# Altium PCB PCB1.PcbDoc
Units mm, origin at the board's own origin, x right, y up, seen from the top; angles counter-clockwise.
Board outline 152.4 x 101.6 mm, 6 copper layers (Top Layer, Int1 (GND), Int2 (Sign), Int3 (Sign), Int4 (PWR), Bottom Layer), stack 1.551 mm thick; 102 components, 80 nets, 404 pads, 0 vias.
Unrouted connection lines stored in the file: 218.
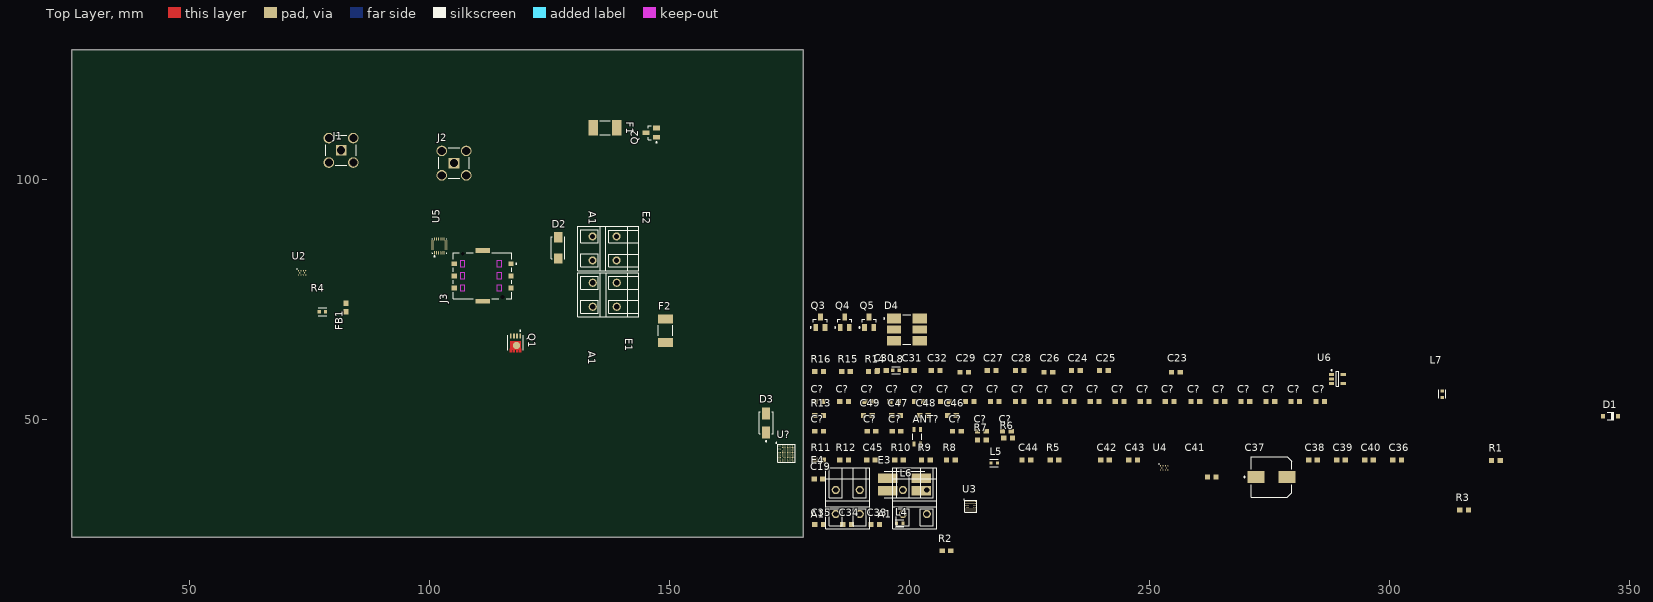
[diagram p0: Top Layer view]
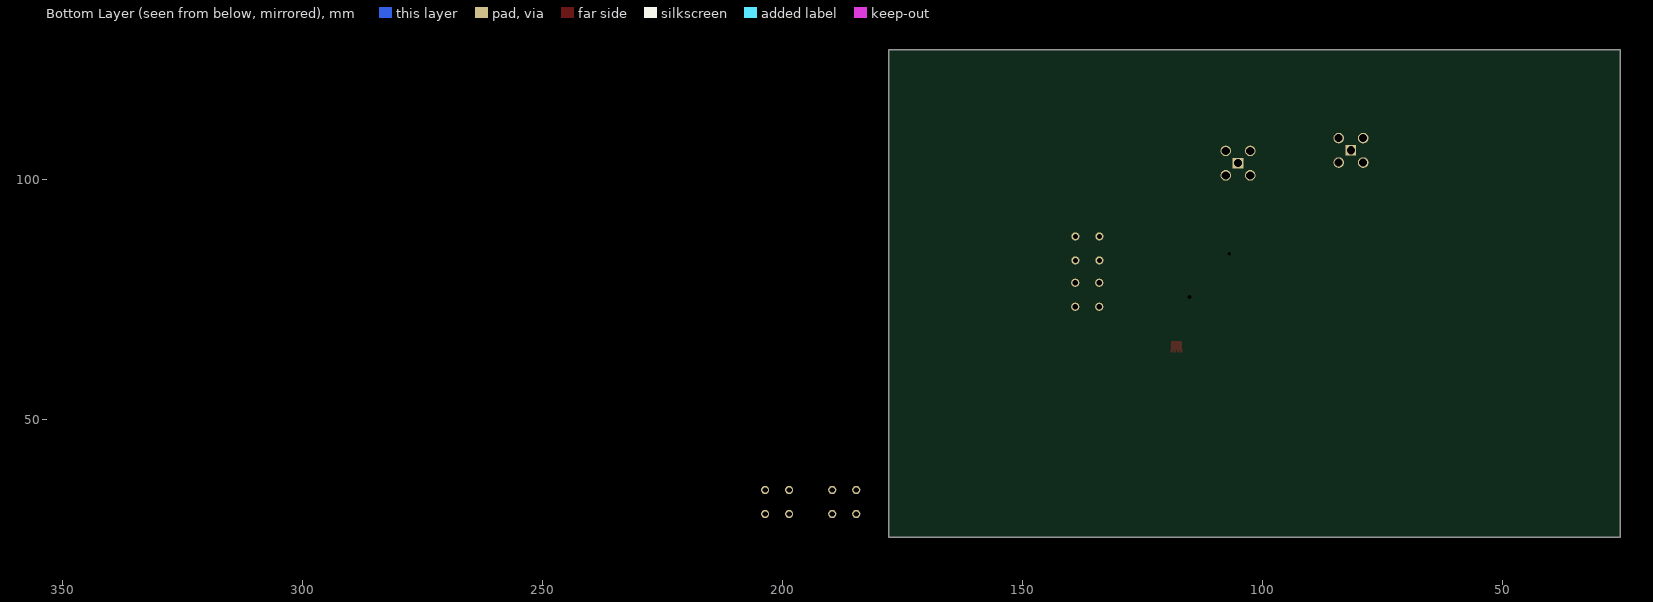
[diagram p1: Bottom Layer view, seen from below]
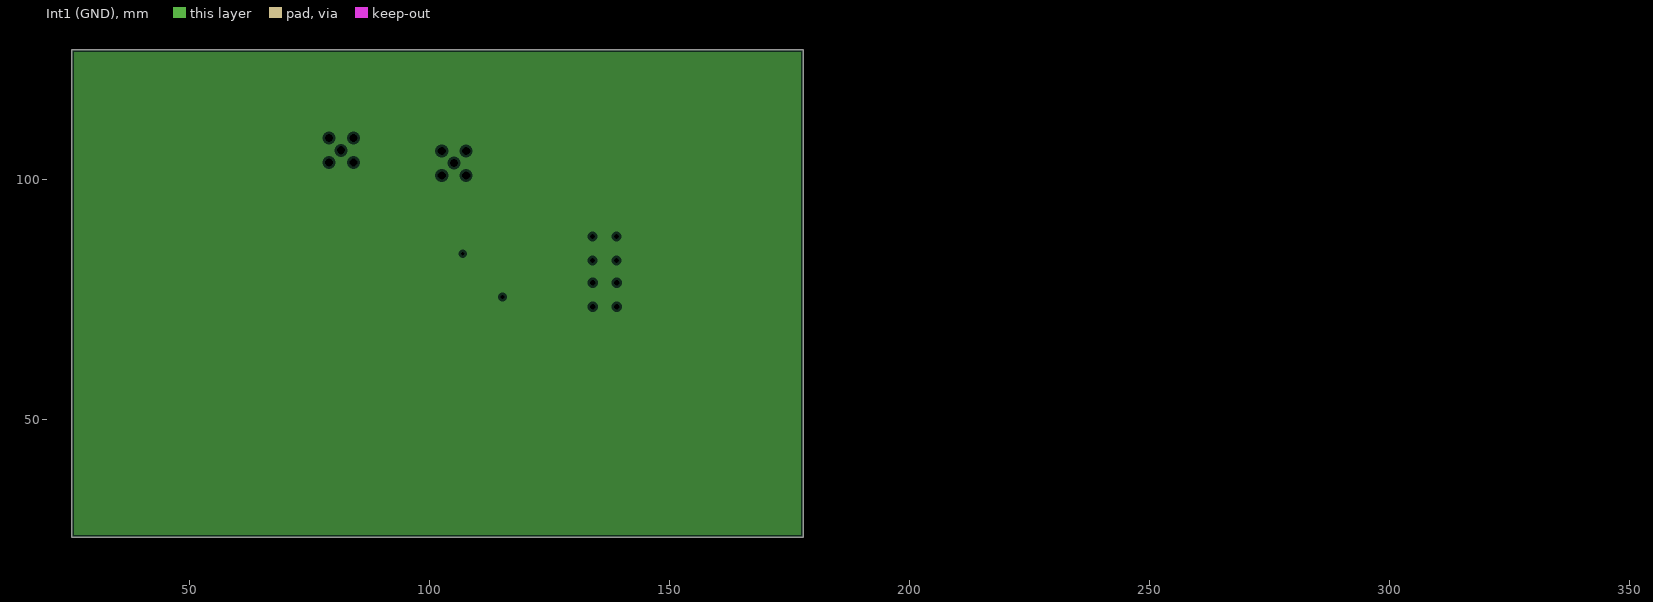
[diagram p2: Int1 (GND), clearances drawn from the general rule]
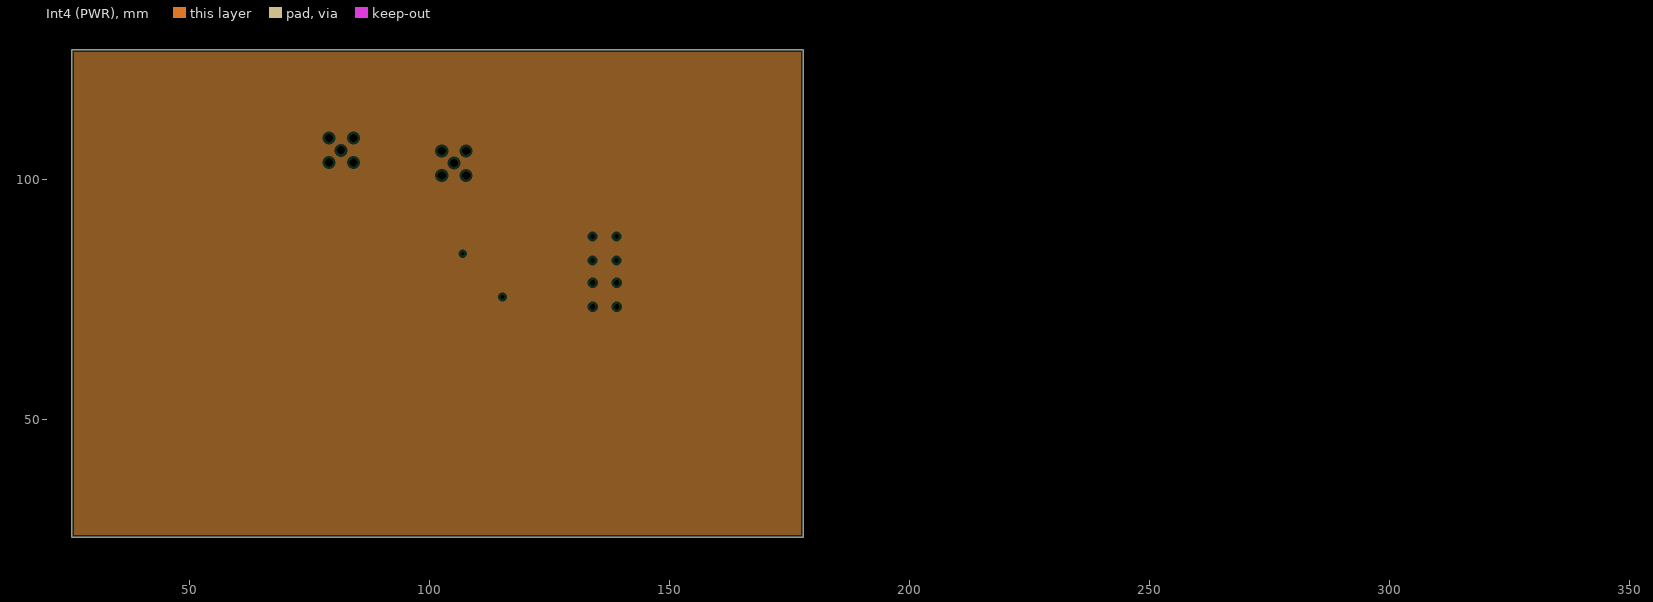
[diagram p3: Int4 (PWR), clearances drawn from the general rule]

## Layer stack, top to bottom
Top Solder: solder mask 0.0254, SM-001, Dk 4
Top Layer: signal copper 0.035
Dielectric 1: prepreg 0.0711, PP-006, Dk 4.1
Dielectric 2: prepreg 0.0711, PP-006, Dk 4.1
Int1 (GND): plane copper 0.035
Dielectric 3: core 0.4572, Core-035, Dk 4.7
Int2 (Sign): signal copper 0.035
Dielectric 4: prepreg 0.0711, PP-006, Dk 4.1
Dielectric 5: prepreg 0.0711, PP-006, Dk 4.1
Int3 (Sign): signal copper 0.035
Dielectric 6: core 0.4572, Core-035, Dk 4.7
Int4 (PWR): plane copper 0.035
Dielectric 7: prepreg 0.0711, PP-006, Dk 4.1
Dielectric 8: prepreg 0.0711, PP-006, Dk 4.1
Bottom Layer: signal copper 0.035
Bottom Solder: solder mask 0.0254, SM-001, Dk 4

## Board outline
25.4,25.4 177.8,25.4 177.8,127 25.4,127

## Design rules (kind name [scope] priority, off if disabled: settings)
Clearance [All] p1: gap=0.127 ignorepadtopadclearanceinfootprint=FALSE
HoleSize [All] p1: absolutevalues=TRUE maxlimit=2.54 minlimit=0.2 maxpercent=80.000 minpercent=20.000
PlaneClearance [All] p1: clearance=0.508
PlaneConnect [All] p1: planeconnectstyle=Relief reliefexpansion=0.508 reliefentries=4 reliefconductorwidth=0.254 reliefairgap=0.254
PolygonConnect [All] p1: connectstyle=Relief reliefconductorwidth=0.254 reliefentries=4 polygonreliefangle="90 Angle" airgapwidth=0.254
RoomDefinition "Sensors and peripherals" [InComponentClass('Sensors and peripherals')] p1: confinementstyle=ConfineIn formatcopy=TRUE lockcomponents=FALSE outline 178.943,65.024 203.962,65.024 203.962,74.93 178.943,74.93
RoomDefinition Power [InComponentClass('Power')] p2: confinementstyle=ConfineIn formatcopy=TRUE lockcomponents=FALSE outline 178.943,58.674 199.136,58.674 199.136,63.754 178.943,63.754
RoomDefinition nrf52840_qiaa_config5 [InComponentClass('nrf52840_qiaa_config5')] p3: confinementstyle=ConfineIn formatcopy=TRUE lockcomponents=FALSE outline 178.943,46.228 287.655,46.228 287.655,57.531 178.943,57.531
RoomDefinition NRF52840 [InComponentClass('NRF52840')] p4: confinementstyle=ConfineIn formatcopy=TRUE lockcomponents=FALSE outline 178.943,43.307 287.655,43.307 287.655,57.531 178.943,57.531
RoomDefinition NRF9160 [InComponentClass('NRF9160')] p5: confinementstyle=ConfineIn formatcopy=TRUE lockcomponents=FALSE outline 0,0 50.8,0 50.8,25.4 0,25.4
RoomDefinition Connector [InComponentClass('Connector')] p6: confinementstyle=ConfineIn formatcopy=TRUE lockcomponents=FALSE outline 178.943,26.924 205.994,26.924 205.994,42.672 178.943,42.672
RoutingVias [All] p1: holewidth=0.2 width=0.5 viastyle="Through Hole" minholewidth=0.2 minwidth=0.4 maxholewidth=0.711 maxwidth=1.27
SolderMaskExpansion [All] p1: expansion=0.102 istentingtop=FALSE
Width [All] p1: maxlimit=1.5 minlimit=0.127 preferedwidth=0.254 minimp=50.000000 maximp=50.000000 favimp=50.000000
27 further rules are at their usual default settings.

## Classes and differential pairs
component class NRF52840: A? ANT? C? U?
component class Connector: E1 E2 E3 E4
component class "Sensors and peripherals": C45 C46 C47 C48 C49 D3 D4 F2 J3 Q2 Q3 Q4 Q5 R13 U4 U5 U6
component class Power: C34 C35 C36 C37 C38 C39 C40 C41 C42 C43 C44 D1 D2 F1 L6 L7 L8 Q1 R3 R4 R5 R6 R7 R8 R9 R10 R11 R12 R14 R15 R16 U3
component class NRF9160: C19 C23 C24 C25 C26 C27 C28 C29 C30 C31 C32 C33 FB1 J1 J2 L4 R1 R2 U2
net class RF: GPS_RF1 GPS_RF2 LTE_RF1
net class "High Power": NetD3_1 NetD3_2
component class nrf52840_qiaa_config5: C? L5

## Components (designator, comment, footprint, x,y, rotation, side; value= is the part's Value field where it differs from the comment)
ANT? "2450AT18D0100E" FP-2450AT18D0100E-MFG 201.549,46.355 r90 top
C19 "15pF" "C0603 (1608)" 180.964,37.592 r0 top
C23 "100nF" "C0603 (1608)" 255.397,59.817 r0 top
C24 "100nF" "C0603 (1608)" 234.569,60.198 r0 top value=47uF
C25 "Cap SMD" "C0603 (1608)" 240.411,60.198 r0 top value=39pF
C26 "15pF" "C0603 (1608)" 228.854,59.817 r0 top value=47uF
C27 "100nF" "C0603 (1608)" 217.043,60.198 r0 top
C28 "Cap SMD" "C0603 (1608)" 222.885,60.198 r0 top value=4.7uF
C29 "100nF" "C0603 (1608)" 211.328,59.817 r0 top
C30 "100nF" "C0603 (1608)" 194.183,60.198 r0 top value=15pF
C31 "100nF" "C0603 (1608)" 200.025,60.198 r0 top
C32 "Cap SMD" "C0603 (1608)" 205.359,60.198 r0 top value=39pF
C33 "Cap SMD" "C0603 (1608)" 192.786,28.067 r0 top value=4.7uF
C34 "Cap SMD" "C0603 (1608)" 186.944,28.067 r0 top value=4.7uF
C35 "Cap SMD" "C0603 (1608)" 181.102,28.067 r0 top value=4.7uF
C36 "Cap SMD" "C0603 (1608)" 301.498,41.529 r0 top value=4.7uF
C37 "UUD1A471MNL1GS" FP-UUD1A471MNL1GS-MFG 275.336,37.973 r0 top
C38 "Cap SMD" "C0603 (1608)" 283.972,41.529 r0 top value=4.7uF
C39 "Cap SMD" "C0603 (1608)" 289.814,41.529 r0 top value=4.7uF
C40 "Cap SMD" "C0603 (1608)" 295.656,41.529 r0 top value=4.7uF
C41 "Cap SMD" "C0603 (1608)" 262.89,37.973 r0 top value=4.7uF
C42 "Cap SMD" "C0603 (1608)" 240.665,41.529 r0 top value=10uF
C43 "Cap SMD" "C0603 (1608)" 246.507,41.529 r0 top value=10uF
C44 "Cap SMD" "C0603 (1608)" 224.282,41.529 r0 top value=10uF
C45 "Cap SMD" "C0603 (1608)" 191.897,41.529 r0 top value=4.7uF
C46 "100nF" "C0603 (1608)" 208.788,50.8 r0 top
C47 "100nF" "C0603 (1608)" 197.104,50.8 r0 top
C48 "100nF" "C0603 (1608)" 202.946,50.8 r0 top
C49 "100nF" "C0603 (1608)" 191.262,50.8 r0 top
C? "100nF" "C0603 (1608)" 233.299,53.721 r0 top
C? "100nF" "C0603 (1608)" 201.93,53.721 r0 top
C? "100nF" "C0603 (1608)" 248.92,53.721 r0 top
C? "100nF" "C0603 (1608)" 186.309,53.721 r0 top
C? "100nF" "C0603 (1608)" 181.102,53.721 r0 top
C? "100nF" "C0603 (1608)" 254.127,53.721 r0 top
C? "100nF" "C0603 (1608)" 280.289,53.721 r0 top
C? "100nF" "C0603 (1608)" 181.102,47.498 r0 top
C? "100nF" "C0603 (1608)" 215.011,47.498 r0 top
C? "100nF" "C0603 (1608)" 192.024,47.498 r0 top
C? "100nF" "C0603 (1608)" 209.804,47.498 r0 top
C? "100nF" "C0603 (1608)" 197.231,47.498 r0 top
C? "100nF" "C0603 (1608)" 220.218,47.498 r0 top
C? "100nF" "C0603 (1608)" 222.885,53.721 r0 top
C? "100nF" "C0603 (1608)" 228.092,53.721 r0 top
C? "100nF" "C0603 (1608)" 269.875,53.721 r0 top
C? "100nF" "C0603 (1608)" 212.471,53.721 r0 top
C? "100nF" "C0603 (1608)" 264.668,53.721 r0 top
C? "100nF" "C0603 (1608)" 217.678,53.721 r0 top
C? "100nF" "C0603 (1608)" 191.516,53.721 r0 top
C? "100nF" "C0603 (1608)" 196.723,53.721 r0 top
C? "100nF" "C0603 (1608)" 275.082,53.721 r0 top
C? "100nF" "C0603 (1608)" 285.496,53.721 r0 top
C? "100nF" "C0603 (1608)" 207.264,53.721 r0 top
C? "100nF" "C0603 (1608)" 243.713,53.721 r0 top
C? "100nF" "C0603 (1608)" 259.461,53.721 r0 top
C? "100nF" "C0603 (1608)" 238.506,53.721 r0 top
D1 "BZT52C16-7-F" DIOD-SOD123-2_V 345.948,50.673 r0 top
D2 "SMAJ24CA" FP-SMAJ-CA-MFG 126.746,85.725 r90 top
D3 "ES2BA-13-F" FP-SMA-MFG 170.053,49.244 r90 top value=25pF
D4 "CLP6C-FKB-CM1Q1H1BB7R3R3" FP-CLP6C-FKB-MFG 199.39,68.707 r0 top
E1 "1884340000" LSF_SMT_5_00_135_02 137.188,75.944 r270 top
E2 "1884340000" LSF_SMT_5_00_135_02 137.16,85.598 r270 top
E3 "1884340000" LSF_SMT_5_00_135_02 201.041,33.528 r0 top
E4 "1884340000" LSF_SMT_5_00_135_02 187.071,33.528 r0 top
F1 "0451005.MRL" FP-0451-MFG 136.525,110.744 r0 top value=0.0125Ω
F2 "0451005.MRL" FP-0451-MFG 149.098,68.453 r90 top value=0.0125Ω
FB1 "BLM18EG121SN1D" FP-BLM18EG121SN1D-MFG 77.637,72.39 r0 top
J1 "1053354-1" TECO-1053354-1_V 81.524,106.035 r0 top
J2 "1053354-1" TECO-1053354-1_V 105.039,103.368 r0 top
J3 "SIM8050-6-0-14-01-A" GCT-SIM8050-6_V 110.998,79.883 r90 top
L4 "LQG18HN68NJ00D" FP-LQG18HH_00-MFG 197.866,28.321 r0 top
L5 "2.2nH" FP-LQG18HH_00-MFG 217.551,40.894 r0 top
L6 "7427521" WE-CMS 198.882,36.449 r0 top
L7 "LQG18HN68NJ00D" FP-LQG18HH_00-MFG 310.896,55.245 r90 top
L8 "LQG18HN68NJ00D" FP-LQG18HH_00-MFG 197.104,60.198 r0 top
Q1 "SI7615ADN-T1-GE3" FP-S16-2667_SINGLE-MFG 117.856,65.913 r270 top
Q2 "BSS123" FAIR-SOT23-3_V 146.126,109.703 r90 top
Q3 "BSS123" FAIR-SOT23-3_V 181.356,70.231 r0 top
Q4 "BSS123" FAIR-SOT23-3_V 186.436,70.231 r0 top
Q5 "BSS123" FAIR-SOT23-3_V 191.516,70.231 r0 top
R1 "Res" "R0603 (1608)" 322.083,41.402 r0 top value=10K
R2 "Res" "R0603 (1608)" 207.645,22.606 r0 top value=1K
R3 "Res" "R0603 (1608)" 315.468,31.115 r0 top value=?R
R4 "Res" "R0603 (1608)" 82.55,73.279 r90 top value=2R2
R5 "Res" "R0603 (1608)" 230.124,41.529 r0 top value=10K
R6 "Res" "R0603 (1608)" 220.461,46.101 r0 top value=10K
R7 "Res" "R0603 (1608)" 215.011,45.72 r0 top value=N.C.
R8 "Res" "R0603 (1608)" 208.534,41.529 r0 top value=1M0
R9 "Res" "R0603 (1608)" 203.327,41.529 r0 top value=2R2
R10 "Res" "R0603 (1608)" 197.739,41.529 r0 top value=1M0
R11 "Res" "R0603 (1608)" 181.102,41.529 r0 top value=N.C.
R12 "Res" "R0603 (1608)" 186.309,41.529 r0 top value=10K
R13 "Res" "R0603 (1608)" 181.102,50.8 r0 top value=?R
R14 "Res" "R0603 (1608)" 192.278,59.944 r0 top value=10K
R15 "Res" "R0603 (1608)" 186.69,59.944 r0 top value=10K
R16 "Res" "R0603 (1608)" 181.102,59.944 r0 top value=10K
U2 "nRF9160-SICAB1A" ONSC-WLCSP-10-567BL-01 73.406,80.518 r0 top
U3 "ADP5360ACBZ" BGA32C40P6X6_238X238X56 212.725,31.881 r0 top
U4 "CM1402-03CP" ONSC-WLCSP-10-567BL-01 252.984,39.878 r0 top
U5 "ICM-20948" FP-ICM-20948-IPC_C 101.981,86.114 r90 top
U6 "TC74A5-5.0VCTTR" SOT-23-CT5_N 289.052,58.42 r0 top
U? "nRF52840-QIAA" BGA94C35P10X10_352X356X50 174.323,42.912 r0 top

## Footprints (in the part's own frame and the unit in brackets; to place one, negate y for a bottom-side part, rotate by r counter-clockwise, add the part's x,y. Pads: shape width x height; smd on the part's side, far side on the other; paste and mask are expansions set on the pad)
BGA32C40P6X6_238X238X56 [mm]
  round 0.21 smd: A1(-1,1) A2(-0.6,1) A3(-0.2,1) A4(0.2,1) A5(0.6,1) A6(1,1) B1(-1,0.6) B2(-0.6,0.6) B3(-0.2,0.6) B4(0.2,0.6) B5(0.6,0.6) B6(1,0.6) C1(-1,0.2) C2(-0.6,0.2) C5(0.6,0.2) C6(1,0.2) D1(-1,-0.2) D2(-0.6,-0.2) D5(0.6,-0.2) D6(1,-0.2) E1(-1,-0.6) E2(-0.6,-0.6) E3(-0.2,-0.6) E4(0.2,-0.6) E5(0.6,-0.6) E6(1,-0.6) F1(-1,-1) F2(-0.6,-1) F3(-0.2,-1) F4(0.2,-1) F5(0.6,-1) F6(1,-1)
  silkscreen extent -1.49,-1.25 1.25,1.49, body extent -1.19,-1.19 1.19,1.19, height 0.56
BGA94C35P10X10_352X356X50 [mm]
  round 0.2 smd mask+0.04: A1(-1.575,1.575) A2(-1.225,1.575) A3(-0.875,1.575) A4(-0.525,1.575) A5(-0.175,1.575) A6(0.175,1.575) A7(0.525,1.575) A8(0.875,1.575) A9(1.225,1.575) A10(1.575,1.575) B3(-0.875,1.225) B4(-0.525,1.225) B5(-0.175,1.225) B6(0.175,1.225) B7(0.525,1.225) B8(0.875,1.225) B9(1.225,1.225) B10(1.575,1.225) C1(-1.575,0.875) C2(-1.225,0.875) C4(-0.525,0.875) C5(-0.175,0.875) C6(0.175,0.875) C7(0.525,0.875) C8(0.875,0.875) C9(1.225,0.875) C10(1.575,0.875) D3(-0.875,0.525) D4(-0.525,0.525) D5(-0.175,0.525) D6(0.175,0.525) D7(0.525,0.525) D8(0.875,0.525) D9(1.225,0.525) D10(1.575,0.525) E1(-1.575,0.175) E2(-1.225,0.175) E3(-0.875,0.175) E4(-0.525,0.175) E5(-0.175,0.175) E6(0.175,0.175) E7(0.525,0.175) E8(0.875,0.175) E9(1.225,0.175) E10(1.575,0.175) F1(-1.575,-0.175) F2(-1.225,-0.175) F3(-0.875,-0.175) F4(-0.525,-0.175) F5(-0.175,-0.175) F6(0.175,-0.175) F7(0.525,-0.175) F8(0.875,-0.175) F9(1.225,-0.175) F10(1.575,-0.175) G1(-1.575,-0.525) G2(-1.225,-0.525) G3(-0.875,-0.525) G4(-0.525,-0.525) G5(-0.175,-0.525) G6(0.175,-0.525) G7(0.525,-0.525) G8(0.875,-0.525) G9(1.225,-0.525) G10(1.575,-0.525) H1(-1.575,-0.875) H2(-1.225,-0.875) H4(-0.525,-0.875) H5(-0.175,-0.875) H6(0.175,-0.875) H7(0.525,-0.875) H8(0.875,-0.875) H9(1.225,-0.875) H10(1.575,-0.875) J1(-1.575,-1.225) J2(-1.225,-1.225) J3(-0.875,-1.225) J4(-0.525,-1.225) J5(-0.175,-1.225) J6(0.175,-1.225) J7(0.525,-1.225) J8(0.875,-1.225) J9(1.225,-1.225) J10(1.575,-1.225) K1(-1.575,-1.575) K2(-1.225,-1.575) K3(-0.875,-1.575) K4(-0.525,-1.575) K5(-0.175,-1.575) K6(0.175,-1.575) K7(0.525,-1.575) K8(0.875,-1.575) K9(1.225,-1.575) K10(1.575,-1.575)
  silkscreen extent -2.22,-1.83 1.83,2.28, body extent -1.77,-1.76 1.77,1.84, height 0.47
"C0603 (1608)" [mm] "Chip Capacitor, 2-Leads, Body 1,60x0,81mm, IPC Low Density"
  rect 1.1x1 smd: 1(-0.9,0) 2(0.9,0)
  body extent -0.8,-0.41 0.8,0.42, height 0.79
DIOD-SOD123-2_V [mm] "SOD123, 2-Leads, Body 2.7x1.55mm, Height 1.45mm"
  rect 0.9x0.95 smd: 1(-1.575,0) 2(1.575,0)
  silkscreen extent -0.64,-0.82 0.64,0.77, body extent -1.35,-0.77 1.35,0.77, height 1.45
FAIR-SOT23-3_V [mm] "SOT23, 3-Leads, Body 2.92x1.3mm, Pitch 0.95mm"
  rect 1x1.4 smd: 1(-0.95,-1.1) 2(0.95,-1.1) 3(0,1.1)
  silkscreen extent -2.12,-1.23 1.46,0.65, body extent -1.46,-0.65 1.46,0.65, height 1.2
FP-0451-MFG [mil]
  rect 77x124 smd paste+0 mask+0: 1(-96.5,0) 2(96.5,0)
  silkscreen extent -43,-58 43,58, body extent -139,-66 139,66, height 10
FP-2450AT18D0100E-MFG [mm]
  rect 1x0.6 smd paste+0 mask+0: 1(-1.5,-0.65) 2(1.5,-0.65) 3(1.5,0.65) 4(-1.5,0.65)
  silkscreen extent -2.67,-0.9 0.63,0.9, body extent -2.1,-1.05 2.1,1.05, height 0.25
FP-BLM18EG121SN1D-MFG [mm]
  rect 0.65x0.7 smd paste+0 mask+0: 1(-0.675,0) 2(0.675,0)
  silkscreen extent -0.87,-0.8 0.87,0.8, body extent -1.1,-0.58 1.1,0.58, height 0.25
FP-CLP6C-FKB-MFG [mm]
  rect 3x2 smd paste+0 mask+0: 1(-2.7,2.3) 3(-2.7,-2.3) 4(2.7,-2.3) 6(2.7,2.3)
  rect 3x1.6 smd paste+0 mask+0: 2(-2.7,0) 5(2.7,0)
  silkscreen extent -4.87,-3.05 0.82,3.05, body extent -4.3,-3.4 4.3,3.4, height 0.25
FP-ICM-20948-IPC_C [mm]
  rect 0.661x0.192 smd paste+0 mask+0: 1(-1.426,1)
  rrect100% 0.661x0.192 smd paste+0 mask+0: 2(-1.426,0.6) 3(-1.426,0.2) 4(-1.426,-0.2) 5(-1.426,-0.6) 6(-1.426,-1) 13(1.426,-1) 14(1.426,-0.6) 15(1.426,-0.2) 16(1.426,0.2) 17(1.426,0.6) 18(1.426,1)
  rrect100% 0.192x0.661 smd paste+0 mask+0: 7(-1,-1.426) 8(-0.6,-1.426) 9(-0.2,-1.426) 10(0.2,-1.426) 11(0.6,-1.426) 12(1,-1.426) 19(1,1.426) 20(0.6,1.426) 21(0.2,1.426) 22(-0.2,1.426) 23(-0.6,1.426) 24(-1,1.426)
  silkscreen extent -2.28,-1.5 1.5,1.5, body extent -1.86,-1.86 1.86,1.86, height 0.25
FP-LQG18HH_00-MFG [mm]
  rect 0.65x0.7 smd paste+0 mask+0: 1(-0.675,0) 2(0.675,0)
  silkscreen extent -0.87,-0.75 0.87,0.75, body extent -1.1,-0.58 1.1,0.58, height 0.25
FP-S16-2667_SINGLE-MFG [mil]
  rect 39x16 smd paste+0 mask+0: 1(-56.5,39) 2(-56.5,13) 3(-56.5,-13) 4(-56.5,-39)
  round 59.4 smd paste+0 mask+0: 5-6-7-8(21,8)
  Top Layer region: -12,44 46,44 46,47 76,47 76,31 56,31 56,21 76,21 76,5 56,5 56,-5 76,-5 76,-21 56,-21 56,-31 76,-31 76,-47 46,-47 46,-44 -12,-44
  silkscreen extent -103,-62 62,62, body extent -80,-71 80,71, height 10
FP-SMA-MFG [mm]
  rect 2.5x1.7 smd paste+0 mask+0: 1(-2,0) 2(2,0)
  silkscreen extent -3.95,-1.46 2.3,1.46, body extent -3.35,-1.56 3.35,1.56, height 0.25
FP-SMAJ-CA-MFG [mm]
  rect 2.1x1.8 smd paste+0 mask+0: 1(-2.2,0) 2(2.2,0)
  silkscreen extent -2.3,-1.4 2.3,1.4, body extent -3.35,-1.5 3.35,1.5, height 0.25
FP-UUD1A471MNL1GS-MFG [mm]
  rect 3.5x2.5 smd paste+0 mask+0: 1(-3.25,0) 2(3.25,0)
  silkscreen extent -5.75,-4.25 4.25,4.25
GCT-SIM8050-6_V [mm] "SMT, 6-Leads, Body 12.2x9.54mm, Pitch 2.54mm"
  rect 1x1.1 smd: C1(2.54,-5.9) C2(0,-5.9) C3(-2.54,-5.9) C5(2.54,5.9) C6(0,5.9) C7(-2.54,5.9)
  rect 1x3 smd: C4(5.3,0) C8(-5.3,0)
  round 0 hole 0.9: MH1(-4.4,-4.15)
  round 0 hole 0.7: MH2(4.6,4.15)
  Top Layer keep-out region: -3.14,-3.95 -1.94,-3.95 -1.94,-2.95 -3.14,-2.95
  Top Layer keep-out region: -3.14,3.7 -1.94,3.7 -1.94,4.7 -3.14,4.7
  Top Layer keep-out region: -0.6,3.7 0.6,3.7 0.6,4.7 -0.6,4.7
  Top Layer keep-out region: 1.94,3.7 3.14,3.7 3.14,4.7 1.94,4.7
  Top Layer keep-out region: 1.94,-3.95 3.14,-3.95 3.14,-2.95 1.94,-2.95
  Top Layer keep-out region: -0.6,-3.95 0.6,-3.95 0.6,-2.95 -0.6,-2.95
  silkscreen extent -4.77,-7.12 4.77,6.1, body extent -5.42,-6.1 5.42,6.1, height 1.37
LSF_SMT_5_00_135_02 [mm] "OMNIMATE Signal - Serie LSF  LSF-SMT 5.00/02/135 3.5"
  round 1.7 hole 1.1: A1(-2.5,1.75) A1(-2.5,-3.25) A2(2.5,1.75) A2(2.5,-3.25)
  silkscreen extent -4.6,-6.35 4.6,6.35, body extent -4.6,-6.35 4.6,6.35, height 13.17
ONSC-WLCSP-10-567BL-01 [mm] "BGA, 10-Balls, Body 1.96x1.33mm"
  round 0.25 smd: A1(-0.75,0.435) A2(-0.25,0.435) A3(0.25,0.435) A4(0.75,0.435) B1(-0.5,0) B2(0.5,0) C1(-0.75,-0.435) C2(-0.25,-0.435) C3(0.25,-0.435) C4(0.75,-0.435)
  silkscreen extent -1.13,0.72 -1.04,0.82, body extent -0.98,-0.66 0.98,0.66, height 0.72
"R0603 (1608)" [mm]
  rect 1.1x1 smd: 1(-0.9,0) 2(0.9,0)
  body extent -0.8,-0.42 0.8,0.38, height 0.45
SOT-23-CT5_N [mm] "SOT23, 5-Leads, Body 2.9x1.7mm, Pitch 0.95mm, Lead Span 2.8mm, IPC Medium Density"
  rect 1.1x0.65 smd: 1(-1.2,0.95) 2(-1.2,0) 3(-1.2,-0.95) 4(1.2,-0.95) 5(1.2,0.95)
  silkscreen extent -1.32,-1.55 0.25,1.95, body extent -0.9,-1.55 0.9,1.55, height 1.45
TECO-1053354-1_V [mm] "THD, 5-Leads, Body 6.3x6.3mm, Pitch 2.55mm"
  rect 2.2x2.2 hole 1.7: 1(0,0)
  round 2.2 hole 1.7: 2(-2.55,2.55) 3(-2.55,-2.55) 4(2.55,-2.55) 5(2.55,2.55)
  silkscreen extent -3.15,-3.15 3.15,3.15, body extent -3.17,-3.17 3.18,3.18, height 9.6
WE-CMS [mm] "Inductor, 4-Leads, Body 8.5x5.6mm"
  rect 4x2 smd: 1(-3.5,1.3) 2(3.5,1.3) 3(-3.5,-1.3) 4(3.5,-1.3)
  silkscreen extent -4.25,-2.75 4.25,2.75, body extent -4.45,-2.85 4.45,2.75, height 3.19

## Part data
ANT?: library part CMP-2000-05543-2, "RF ANT 2.4GHZ CHIP SOLDER SMD", Case/Package=SMD/SMT, Frequency=2.45GHz, Max Power Dissipation=2W, Package Quantity=3000, Bandwidth=100MHz, Gain=-1dB, Height=0.047inch, Impedance=50R, Length=3.2mm, Mount="Surface Mount", Number of Bands=1, Packaging="Tape and Reel", Power Rating=2W, Radiation Hardening=No, Return Loss=-10dB, RoHS Compliant=Yes, Series=-, Termination=Solder, Width=1.6mm
C19 C23 C24 C26 C27 C29 C30 C31 C46 C47 C48 C49 C? C? C? C? C? C? C? C? C? C? C? C? C? C? C? C? C? C? C? C? C? C? C? C? C? C? C?: library part "Cap SMD"
C37: library part CMP-0687-00070-2, "CAP ALUM 470UF 20% 10V SMD", Capacitance=470uF, Case/Package=Radial, Dielectric Material=Aluminium, Leakage Current=3uA, Max Operating Temperature=105°C, Min Operating Temperature=-55°C, Package Quantity=500, Ripple Current=450mA, Tolerance=20%, Voltage=10V, Diameter=8mm, Dissipation Factor=0.24%, Height=10mm, Height - Seated (Max)=0.394inch, Impedance=170mR, Lead Diameter=1.1mm, Lead Free="Lead Free", Lead Pitch=3.1mm, Length=10mm, Life (Hours)=5000Hour, Number of Pins=2, Packaging="Tape and Reel", Radiation Hardening=No, REACH SVHC="No SVHC", Ripple Current (AC)=450mA, Termination=SMD/SMT, Voltage Rating=10V, Voltage Rating (DC)=10V
D1: library part CMP-0860-00001-1, "Surface Mount Zener Diode, 16 V, -65 to 125 degC, SOD123, RoHS, Tape and Reel", Manufacturer="Diodes Inc", Maximum Reverse Current="0.1 uA", Operating Temperature="-65 to 150 degC", Power Max="500 mW", Voltage Zener="16 V Typ.", ComponentLink1Description="Manufacturer URL", ComponentLink1URL=http://www.diodes.com/, ComponentLink2Description=Datasheet, ComponentLink2URL=http://www.diodes.com/datasheets/ds18004.pdf, ComponentLink3Description="Package Specification", ComponentLink3URL=http://www.diodes.com/datasheets/ap02002.pdf, DatasheetVersion="Rev. 37-2", Maximum Zener Impedance f="1 kHz ZZK=200 Ohm", Mounting Technology="Surface Mount", PackageDescription="2-Pin SOD123, Body 2.7 x 1.55 mm, Height 1.45 mm", PackageReference=SOD123, PackageVersion="Rev. 79", Packing="Tape and Reel", PartNumber=BZT52C16-7-F, RoHS=TRUE, Tol V="5.56% Typ."
D2: library part CMP-2000-07087-2, "TVS DIODE 24V 38.9V DO214AC", Breakdown Voltage=26.7V, Clamping Voltage=38.9V, Manufacturer=Littelfuse, Max Junction Temp=+150°C, Package=SMAJ-CA, Peak Pulse Current=10.3A, Peak Pulse Power=400W, Reverse Standoff Voltage=24V, Temperature="-65°C to +150°C", Temperature Range Low=-65°C, Automotive=No, Category=Diode, ComponentLink2Description=Datasheet, ComponentLink2URL=https://www.littelfuse.com/~/media/electronics/datasheets/tvs_diodes/littelfuse_tvs_diode_smaj_datasheet.pdf.pdf, Device Class L1="Circuit Protection", Device Class L2="TVS Diodes", Device Class L3=unset, Digikey Description="TVS DIODE 24V 38.9V DO214AC", Direction=Bidirectional, Height=2.29mm, Lead Free=Yes, Manufacturer Part Number=SMAJ24CA, Mouser Description="In a Pack of 25, Littelfuse SMAJ24CA, Bi-Directional TVS Diode, 400W, 2-Pin DO-214AC", Number Of Channels=1, Octopart=https://octopart.com/smaj24ca-littelfuse-350011, RoHS=TRUE, Temperature Range High=+150°C
D3: library part CMP-12791-000037-1, "DIODE GEN PURP 100V 2A SMA", Capacitance=25pF, Forward Current=2A, Manufacturer="Diodes Inc.", Max Junction Temp=+150°C, Max Repetitive Reverse Voltage=100V, Max Surge Forward Current=50A, Package=SMA, Peak Reverse Current=5uA, Temperature="-55°C to +150°C", Temperature Range Low=-55°C, Automotive=No, Category=Diode, ComponentLink2Description=Datasheet, ComponentLink2URL=https://www.diodes.com/assets/Datasheets/ds14002.pdf, Device Class L1="Discrete Semiconductors", Device Class L2=Diodes, Device Class L3="Rectifier Diodes", Digikey Description="DIODE GEN PURP 100V 2A SMA", Footprint Url=https://www.diodes.com/assets/Package-Files/SMA.pdf, Height=2.4mm, Lead Free=Yes, Manufacturer Part Number=ES2BA-13-F, Mouser Description="ES2BA Series 100 V 2 A Surface Mount Super-Fast Rectifier - DO-214AC", Octopart=https://octopart.com/es2ba-13-f-diodes+inc.-14402013, Reverse Voltage=100V, RoHS=TRUE, Standoff Height=0.05mm, Temperature Range High=+150°C
D4: library part CMP-13977-000019-1, "LED RGB DIFFUSED 6PLCC SMD", Case/Package=SMD/SMT, Color=Blue, Forward Current=50mA, Forward Voltage=3.2V, Lens Color=White, Max Operating Temperature=100°C, Min Operating Temperature=-40°C, Package Quantity=900, Reverse Voltage=5V, Test Current=20mA, Depth=5mm, Dominant Wavelength=470nm, Height=2.6mm, Length=6mm, Lens Style=Round, Lens Transparency=Diffused, Luminous Intensity=457.5mcd, Mount="Surface Mount", Number of Elements=3, Number of LEDs=3, Number of Pins=6, Packaging="Tape and Reel", Radiation Hardening=No, Viewing Angle=120°, Width=5mm
E1 E2 E3 E4: library part CMP-1559-02276-1, "OMNIMATE Signal - series LSF", Colour=Black, Manufacturer=Weidmueller, Rated_current_min_no_of_poles_TU_20_deg_C="19 A", Rated_current_use_group_B_UL_1059="12 A", Rated_voltage_for_surge_voltage_class_pollution_degree_II_2="500 V", Rated_voltage_use_group_B_UL_1059="300 V", UL_94_flammability_rating=V-0, ComponentLink1Description="Manufacturer URL", ComponentLink1URL=http://www.weidmueller.com/, ComponentLink2Description="URL Link1", ComponentLink2URL=http://catalog.weidmueller.com/catalog/Start.do?localeId=en&ObjectID=1884340000, Contact_material=Cu-Leg, Contact_surface=tinned, Insulating_material="LCP GF", Mounting_onto_the_PCB="Reflow solder connection", No_of_poles=2, PackageReference=LSF_SMT_5_00_135_02, Packaging=Tube, PartNumber=1884340000, Pitch_inch="0,197 inch", Pitch_mm="5 mm", Qty="60 PCS", Revision=V1, Short_text_for_material="LSF-SMT 5.00/02/135 3.5SN BK TU", Side_termination_characteristic="closed side", Solder_pin_length_mm="3,5 mm", Solid_max_H05_07_V_U="1,5 mm²", Solid_min_H05_07_V_U="0,2 mm²", Wire_cross_section_AWG_max_UL_1059="AWG 16", Wire_cross_section_AWG_min_UL_1059="AWG 24"
F1 F2: library part CMP-2000-05653-2, "FUSE BRD MNT 5A 125VAC/VDC 2SMD", Fuse Current=5A, Fuse Interrupt Ac Current=50A, Manufacturer="Littelfuse Inc", Max Fuse Ac Voltage=125V, Package=0451, Resistance=0.0125Ω, Temperature="-55°C to +125°C", Temperature Range High=+125°C, Temperature Range Low=-55°C, Automotive=No, Category=Fuse, ComponentLink2Description=Datasheet, ComponentLink2URL=https://www.littelfuse.com/~/media/electronics/datasheets/fuses/littelfuse_fuse_451_453_datasheet.pdf.pdf, Device Class L1="Circuit Protection", Device Class L2=Fuses, Device Class L3=unset, Digikey Description="FUSE BRD MNT 5A 125VAC/VDC 2SMD", Fuse Blow Speed=Fast, Fuse I2T=5.566A2Sec, Fuse Interrupt Dc Current=50A, Height=2.94mm, Lead Free=Yes, Manufacturer Part Number=0451005.MRL, Max Fuse Dc Voltage=125V, Mouser Description="Surface Mount Fuses 125V 5A", Octopart=https://octopart.com/0451005.mrl-littelfuse-566389, RoHS=TRUE, Voltage Rating=125V
FB1: library part CMP-0686-00355-3, "FERRITE BEAD 120 OHM 0603 1LN", Impedance At Frequency="120Ω @ 100MHz", Manufacturer=Murata, Package=0603, Rms Current=2000mA, Series Resistance=0.06Ω, Temperature="-55°C to +125°C", Temperature Range High=+125°C, Temperature Range Low=-55°C, Tolerance=25%, Automotive=No, Category=FBead, ComponentLink2Description=Datasheet, ComponentLink2URL=https://www.murata.com/en-us/products/productdata/8796747366430/ENFA0021.pdf, Core Material=Ferrite, Device Class L1="Passive Components", Device Class L2="EMI / RFI Components", Device Class L3="Ferrite Beads and Chips", Digikey Description="FERRITE BEAD 120 OHM 0603 1LN", Height=0.95mm, Ipc Land Pattern Name=CAPC16080X80, Lead Free=Yes, Manufacturer Part Number=BLM18EG121SN1D, Mouser Description="Ferrite Beads 120ohms GHz General Usage", Octopart=https://octopart.com/blm18eg121sn1d-murata-368362, RoHS=TRUE
J1 J2: library part CMP-2000-05830-1, "Female Coaxial Connector, Pitch 2.55 mm, Height 9.5 mm, Tail Length 3.9 mm, RoHS, Bulk", Manufacturer="TE Connectivity", Package Description="Female Coaxial Connector, Pitch 2.55 mm, Height 9.5 mm, Tail Length 3.9 mm", Standard Package=125, 3D Model=1053354-1.pdf, Category=Connectors,Interconnects, Connector Style=SMA, Connector Type=Jack,FemaleSockets, Contact Termination=Solder, Datasheet URL=http://www.te.com/commerce/DocumentDelivery/DDEController?Action=srchrtrv&DocNm=1053354&DocType=Customer+Drawing&DocLang=English, Datasheet Version="Rev. B, 05/2011", Dynamic Catalog=SMA, Family=CoaxialConnectors(RF), Fastening Type=Threaded, Impedance=50Ohm, Manufacturer URL=http://www.te.com/, Mounting Technology=ThroughHole, Mounting Type=ThroughHole, Other Names="2062000000 / A30046", Package Reference=1053354-1, Packaging=Bulk, RoHS Information=1053354-1StatementofCompliance, Series=SMA
J3: library part CMP-2000-07068-1, "Nano SIM Card Connect Push-Pull Type, Profile Height 1.35 mm, 30 V Max, 0.5 A Max, -40 to 85 degC, 6-Pin SMT, RoHS, Tape and Reel", Manufacturer="Global Connector Technology", Package Description="6-Pin Surface Mount Device, Body 12.2 x 9.54 mm, Pitch 2.54 mm", Datasheet URL=http://gct.co/sim-connectors/pdf/SIM8050.pdf, Datasheet Version="Rev. E, 09/2015", Manufacturer URL=http://gct.co/, Mounting Technology=SurfaceMount, No of Positions=6, Package Reference=SIM8050-6-0-14-01-A, Pitch=1.45mm, Style/Orientation=Receptacle, Termination=PushPull, Type=Contact
L4 L7 L8: library part CMP-06042-006563-1, "Multilayer type RF Inductor 68nH ±5% 0.8Ω 400mA 0603", Case Code (Imperial)=0603, Case Code (Metric)=1608, Current Rating=300mA, DC Resistance (DCR)=800mR, Inductance=68nH, Inductance Tolerance=5%, Max Operating Temperature=85°C, Min Operating Temperature=-55°C, Package Quantity=4000, Self Resonant Frequency=1GHz, Test Frequency=100MHz, Case/Package=0603, Core Material=Air, DC Current=300mA, Depth=0.95mm, Height=0.031inch, Lead Free="Lead Free", Length=0.063inch, Max DC Current=300mA, Military Standard=Not, Mount="Surface Mount", Number of Pins=2, Packaging="Tape and Reel", Q Factor=12, Radiation Hardening=No, REACH SVHC="No SVHC", Shielding=Unshielded, Termination=SMD/SMT, Tolerance=5%, Width=0.8mm
L5: library part L0201-2n2, "High frequency chip inductor ±5%", Component Class=Inductors, Footprint Doc=0201, LatestRevisionDate=2013-04-10, Pad Count=2, Part Number=L0201-2n2, Published=2013-04-10
L6: library part CMP-0220-00057-1, "Common Mode SMD Bead WE-CMS, Z = 52 Ohm", ComponentLink1Description="Manufacturer Link", ComponentLink1URL=http://www.we-online.com, ComponentLink2Description=Datasheet, ComponentLink2URL=http://www.we-online.de/katalog/media/pdf/7427521.pdf, DatasheetVersion="ver 8, Jul-2010", Impedance="52 Ohm", PackageDescription="Inductor, 4-Leads, Body 8.5 x 5.6 mm", PackageReference=WE-CMS, PackageVersion=2010
Q1: library part CMP-02550-000167-1, "MOSFET P-CH 20V 35A 1212-8S", Continuous Drain Current=-22.1A, Drain To Source Breakdown Voltage=-20V, Drain To Source Resistance=0.0035Ω, Gate To Source Voltage=12V, Input Capacitace At Vds="5590pF @ -10V", Manufacturer=Vishay, Max Forward Diode Voltage=-1.1V, Max Junction Temp=+150°C, Package=S16-2667_SINGLE, Power Dissipation=3.7W, Pulse Drain Current=-80A, Temperature="-55°C to +150°C", Temperature Range Low=-55°C, Typ Forward Diode Voltage=-0.72V, Automotive=No, Category=Trans, ComponentLink2Description=Datasheet, ComponentLink2URL=http://www.vishay.com/docs/62667/si7615adn.pdf, Depletion Mode=False, Device Class L1="Discrete Semiconductors", Device Class L2=Transistors, Device Class L3=MOSFETs, Digikey Description="MOSFET P-CH 20V 35A 1212-8S", Drain To Source Voltage=-20V, Gate Charge At Vgs="122nC @ -10V", Height=1.12mm, Lead Free=Yes, Manufacturer Part Number=SI7615ADN-T1-GE3, Mouser Description="MOSFET -20V 4.4mOhm@10V 35A P-Ch G-III", Number Of Channels=1, Number Of P Channels=1, Octopart=https://octopart.com/si7615adn-t1-ge3-vishay-45331111, Reverse Recovery Charge=11nC, Reverse Recovery Time=27ns, RoHS=TRUE, Rthja Max=33°C/W, Standoff Height=0mm, Temperature Range High=+150°C, Threshold Vgs Max=-1.5V, Threshold Vgs Min=-0.4V, Transconductance=82S, Turn Off Delay Time=85ns, Turn On Delay Time=13ns
Q2 Q3 Q4 Q5: library part CMP-2000-04934-1, "N-Channel Logic Level Enhancement Mode Field Effect Transistor, 1.7 V, -55 to 150 degC, 3-Pin SOT-23, RoHS, Tape and Reel", Manufacturer=Fairchild, Maximum Continuous Drain Current=0.17A, Maximum Drain Source Voltage=100V, Maximum Gate Source Voltage=±20V, Operating Temperature=-55to150degC, Package=3SOT-23, Package Description="3-Pin Small Outline Transistor, Body 2.92 x 1.325 mm, Pitch 0.95 mm", Package Reference=SOT23-3, Package Version="Rev. 12, 03/2016", Category=MOSFET, Channel Mode=Enhancement, Channel Type=N, Datasheet URL=https://www.fairchildsemi.com/datasheets/BS/BSS123.pdf, Datasheet Version=Jun-03, Manufacturer URL=https://www.fairchildsemi.com/, Mounting=SurfaceMount, Package URL=http://www.fairchildsemi.com/dwg/MA/MA03D.pdf, Packaging=Tape&Reel, Rad Hard=No, RDS-on=6000@10VmOhm, Typical Fall Time=2.4ns, Typical Rise Time=9ns, Typical Turn-Off Delay Time=17ns, Typical Turn-On Delay Time=1.7ns
R1 R2 R3 R4 R5 R6 R7 R8 R9 R10 R11 R12 R13 R14 R15 R16: library part "Resistor EU"
U2: "Low power System-in-Package with integrated LTE-M/NB-IoT modem and GPS", Manufacturer="Nordic Semiconductor", Part number IPS=80000002329, Artikkelnr Noca=N.A., Component Class=nRF_Devices, ComponentLink1Description=Datasheet, ComponentLink1URL=N.A., ComponentLink2Description="Supplier link", ComponentLink2URL=N.A., Footprint Doc=LGA-161, HelpURL=N.A., LatestRevisionDate=2020-08-13, Manufacturer Part Number=nRF9160-SICAB1A, Note=N.A., Pad Count=161, Part Number=nRF9160-SICAB1A, PartId=102000165, Published=2020-08-13, Supplier 1="Nordic Semiconductor", Supplier 2=N.A., Supplier Part Number 1=nRF9160-SICAB1A, Supplier Part Number 2=N.A.
U3: "Advanced Battery Management PMIC With Ultralow Iq Buck and Buck-Boost", Manufacturer="Analog Devices", Part number IPS=80000001823, Supplier Part Number 1=N.A., Artikkelnr Noca=N.A., Component Class=Misc_ICs, ComponentLink1Description=Datasheet, ComponentLink1URL="\\hizz\pro\app9717\Datasheet\integated circuits\analog\ADP5360 PRC3 Datasheet_022017.pdf", ComponentLink2Description="Supplier link", ComponentLink2URL=N.A., Footprint Doc=WLCSP-32, HelpURL=N.A., LatestRevisionDate=2018-09-18, Manufacturer Part Number=ADP5360ACBZ, Note=N.A., Pad Count=32, Part Number=ADP5360ACBZ, PartId=101900554, Published=2018-09-18, Supplier 1=N.A., Supplier 2=N.A., Supplier Part Number 2=N.A.
U4: library part CMP-1066-00070-1, "SIM Card EMI Filter Array with ESD Protection, -40 to 85 degC, 10-Pin WLCSP, Pb-Free, Tape and Reel", Manufacturer="On Semiconductor", C Typ (pF)=20, ComponentLink1Description="Manufacturer URL", ComponentLink1URL=http://www.onsemi.com/, ComponentLink2Description=Datasheet, ComponentLink2URL=http://www.onsemi.com/pub_link/Collateral/CM1402-D.PDF, ComponentLink3Description="Package Specification", ComponentLink3URL=http://www.onsemi.com/pub_link/Collateral/567BL.PDF, DatasheetVersion="Rev. 4", Mounting Technology="Surface Mount", Number of Lines=4, PackageDescription="10-Ball Wafer Level Chip Scale Package, Body 1.96 x 1.33 mm", PackageReference=WLCSP-10-567BL-01, PackageVersion="Rev. O, 07/2010", Packing="Tape and Reel", PartNumber=CM1402-03CP, RoHS=Pb-Free
U5: library part CMP-221217-000001-1, "IMU ACCEL/GYRO/COMPI2C/SPI 24QFN"
U6: library part CMP-0192-00193-1, "Tiny Serial Digital Thermal Sensor, 5-Pin SOT-23, Extended Temperature, Tape and Reel", Code_IPC=SOT23-5, DatasheetVersion="revC, Oct-2002", PackageDescription="5-Lead Plastic Small Outline Transistor (CT) [SOT-23]", PackageReference=SOT-23-CT5, PackageVersion="revBB, Aug-2009"
U?: "Multi-protocol Bluetooth Low Energy, IEEE 802.15.4, ANT and 2.4GHz proprietary system-on-chip", Footprint Doc=AQFN-73, LatestRevisionDate=2017-08-21, Pad Count=73, Part Number=nRF52840-QIAA, Published=2017-08-21

## Nets (pads, with @x,y where several pads share a name; then routed paths per layer and width w, separated by ;. In a path a pad name is that pad's centre, name@x,y a point inside that pad or via, vN(x,y) a via of type N, cw(c..) or ccw(c..) an arc to the next point about the centre after c; other vN are vias at no path point)
+1v8: C28.2 C29.2
+3v3: C19.2 C23.2 C24.2 C25.2 C26.2 C27.2 C30.2 C34.2 C36.2 C47.2 C48.2 C49.2 FB1.1 L4.2 L7.2 U3.A3 U3.D1 U5.8 U5.13 U6.3
AGND: C43.1 R14.1 R15.2 R16.2 U3.A1 U3.F1
Blue_CTRL: Q5.1
Blue_LED: Q5.3
BT_ANT: L5.2
COEX0: 
COEX1: 
COEX2: 
DEC1: C?.1@237.606,53.721
DEC3: C?.1@242.813,53.721
DEC4_6: C?.1@227.192,53.721 C?.1@279.389,53.721 C?.1@284.596,53.721
ENABLE: R1.2
GND: C19.1 C23.1 C24.1 C25.1 C26.1 C27.1 C28.1 C29.1 C30.1 C31.1 C33.2 C34.1 C35.1 C36.1 C37.1 C38.1 C39.1 C40.1 C41.1 C42.1 C44.1 C45.2 C46.1 C47.1 C48.1 C49.1 C?.1@180.202,53.721 C?.1@185.409,53.721 C?.1@190.616,53.721 C?.1@195.823,53.721 C?.1@201.03,53.721 C?.1@206.364,53.721 C?.1@211.571,53.721 C?.1@214.111,47.498 C?.1@216.778,53.721 C?.1@219.318,47.498 C?.1@221.985,53.721 C?.2@228.992,53.721 C?.2@234.199,53.721 C?.2@239.406,53.721 C?.2@244.613,53.721 C?.2@249.82,53.721 C?.2@255.027,53.721 C?.2@260.361,53.721 C?.2@265.568,53.721 C?.2@270.775,53.721 C?.2@275.982,53.721 C?.2@281.189,53.721 C?.2@286.396,53.721 D2.1 E1.A2 E2.A2 J1.2 J1.3 J1.4 J1.5 J2.2 J2.3 J2.4 J2.5 J3.C5 L6.3 L6.4 Q2.2 Q3.2 Q4.2 Q5.2 R3.1 U3.B2 U3.F4 U4.B1 U4.B2 U5.18 U5.20 U6.2
GPS_RF1: C32.2
GPS_RF2: C32.1 J1.1 L4.1
Green_CTRL: Q4.1
Green_LED: E4.A1
INT1: U5.12
LTE_RF1: J2.1
NetC31_2: C31.2 R2.2
NetC33_1: C33.1
NetC35_2: C35.2 R4.2 U3.F2
NetC40_2: C40.2 R9.2 U3.C1
NetC46_2: C46.2 U5.10
NetC?_2: C?.2@215.911,47.498
NetD1_1: D1.1 Q1.4 R3.2
NetD3_1: D3.1 F2.1
NetD3_2: D3.2 Q2.3
NetF1_1: F1.1 L6.2
NetF1_2: F1.2 Q1.5-6-7-8
NetFB1_2: FB1.2 R1.1
NetJ3_C2: J3.C2 U4.A1
NetJ3_C3: J3.C3 U4.A2
NetJ3_C7: J3.C7 U4.A3
NetL2_1: 
NetL7_1: L7.1 U3.E1
NetL8_1: L8.1 U3.B1
NetL8_2: L8.2 U3.A2
NetQ2_1: Q2.1 R13.1
NetR5_1: R5.1 U3.B5
NetR6_1: R6.1 U3.C5
NetR7_1: R7.1 U3.F3
NetR8_1: R8.1 U3.E2
NetR10_1: R10.1 U3.B4
NetR11_1: R11.1 R16.1 U3.B3
NetR12_1: R12.1 U3.E4
NetR13_2: R13.2
NetR14_2: R14.2 U3.D5
NetR15_1: R15.1 U3.E5
NetST1_1: U3.C6
NetTP1_1: 
NetTP2_1: 
NFC1: 
NFC2: 
nRF91_RST: R2.1
nRF91_SWDCLK: 
nRF91_SWDIO: 
P0.00/XL1: C?.1@253.227,53.721
P0.01/XL2: C?.1@232.399,53.721
Red_CTRL: Q3.1
Red_LED: Q3.3
RF: C?.2@213.371,53.721 C?.2@223.785,53.721 L5.1
SCL: U5.23 U6.4
SDA: U5.24 U6.5
SIM_1V8: C45.1 J3.C1 U4.A4
SIM_CLK: U4.C2
SIM_DET: 
SIM_IO: U4.C3
SIM_RST: U4.C1
THR: U3.B6
VBAT: C41.2 U3.D6
VBUS: C37.2 C38.2 C39.2 C42.2 C?.2@187.209,53.721 D1.2 E3.A1 F2.2 Q1.1 Q1.2 Q1.3 U3.F6
VDD: C43.2 R5.2 R6.2 R11.2 R12.2 U3.F5
VDD_nRF: C?.1@248.02,53.721 C?.1@258.561,53.721 C?.2@182.002,53.721 C?.2@192.416,53.721 C?.2@202.83,53.721
VLEAD: D2.2 E1.A1 L6.1
VLiPo: E2.A1
VSYS: C44.2 R4.1 R7.2 R8.2 R9.1 R10.2 U3.E6
XC1: C?.1@263.768,53.721
XC2: C?.1@268.975,53.721
pads on no net: ANT?.1 ANT?.2 ANT?.3 ANT?.4 C?.1@180.202,47.498 C?.1@191.124,47.498 C?.1@196.331,47.498 C?.1@208.904,47.498 C?.1@274.182,53.721 C?.2@182.002,47.498 C?.2@192.924,47.498 C?.2@197.623,53.721 C?.2@198.131,47.498 C?.2@208.164,53.721 C?.2@210.704,47.498 C?.2@218.578,53.721 C?.2@221.118,47.498 D4.1 D4.2 D4.3 D4.4 D4.5 D4.6 E3.A2 E4.A2 J3.C4 J3.C6 J3.C8 J3.MH1 J3.MH2 Q4.3 U2.A1 U2.A2 U2.A3 U2.A4 U2.B1 U2.B2 U2.C1 U2.C2 U2.C3 U2.C4 U3.A4 U3.A5 U3.A6 U3.C2 U3.D2 U3.E3 U4.C4 U5.1 U5.2 U5.3 U5.4 U5.5 U5.6 U5.7 U5.9 U5.11 U5.14 U5.15 U5.16 U5.17 U5.19 U5.21 U5.22 U6.1 U?.A1 U?.A2 U?.A3 U?.A4 U?.A5 U?.A6 U?.A7 U?.A8 U?.A9 U?.A10 U?.B3 U?.B4 U?.B5 U?.B6 U?.B7 U?.B8 U?.B9 U?.B10 U?.C1 U?.C2 U?.C4 U?.C5 U?.C6 U?.C7 U?.C8 U?.C9 U?.C10 U?.D3 U?.D4 U?.D5 U?.D6 U?.D7 U?.D8 U?.D9 U?.D10 U?.E1 U?.E2 U?.E3 U?.E4 U?.E5 U?.E6 U?.E7 U?.E8 U?.E9 U?.E10 U?.F1 U?.F2 U?.F3 U?.F4 U?.F5 U?.F6 U?.F7 U?.F8 U?.F9 U?.F10 U?.G1 U?.G2 U?.G3 U?.G4 U?.G5 U?.G6 U?.G7 U?.G8 U?.G9 U?.G10 U?.H1 U?.H2 U?.H4 U?.H5 U?.H6 U?.H7 U?.H8 U?.H9 U?.H10 U?.J1 U?.J2 U?.J3 U?.J4 U?.J5 U?.J6 U?.J7 U?.J8 U?.J9 U?.J10 U?.K1 U?.K2 U?.K3 U?.K4 U?.K5 U?.K6 U?.K7 U?.K8 U?.K9 U?.K10

## Polygon pours and split planes (outlines as drawn)
no net on Int1 (GND) (split plane): 177.29,25.91 25.91,25.91 25.91,126.49 177.29,126.49
no net on Int4 (PWR) (split plane): 177.29,25.91 25.91,25.91 25.91,126.49 177.29,126.49

## Text inside footprints (layer, text, board x,y; h text height)
E1: Top Overlay "A1" at 132.997,64.133 h1.5 r270
E2: Top Overlay "A1" at 133.115,93.36 h1.5 r270
E3: Top Overlay "A1" at 193.279,29.483 h1.5
E4: Top Overlay "A1" at 179.309,29.483 h1.5